# EAGLE board aurdino 12 (EAGLE 9.7.0)

Size 84.16 x 104.87 mm. Coordinates in mm from the lower left corner, seen from the top.
Outline: 0,0 84.17,0 84.17,104.87 0,104.87 0,0
Copper layers (1*16): Top 0.035mm / dielectric 1.5mm / Bottom 0.035mm
Design rules "default": minimum track width 6mil, minimum drill 0.35mm, track to track 6mil, track to pad 6mil, pad to pad 6mil, via to via 6mil, smd to smd 6mil, copper to edge 40mil, drill to drill 6mil, minimum pad ring 10mil, minimum via ring 8mil, stop-mask expansion 4mil, vias tented up to drill 0mil, thermal gap 10mil

## Footprints (pad centres in the part's own frame; a part is rotated, then mirrored left to right if it is on the bottom)
LEDRD254W60D565H860B = drill 0.981 pad 1.581: 1 -1.27,0; 2 1.27,0
LEDRD254W60D565H860B_O = drill 0.981 pad 1.581: 1 -1.27,0; 2 1.27,0
LEDRD254W60D565H860B_Y = drill 0.981 pad 1.581: 1 -1.27,0; 2 1.27,0
LEDRD254W60D565H860B_G = drill 0.981 pad 1.581: 1 -1.27,0; 2 1.27,0
LEDRD254W60D565H860B_B = drill 0.981 pad 1.581: 1 -1.27,0; 2 1.27,0
LEDRD254W60D565H860B_W = drill 0.981 pad 1.581: 1 -1.27,0; 2 1.27,0
RESAD1016W63L850D250B = drill 0.83 pad 1.43: 1 -5.08,0; 2 5.08,0
SWITCH-MOMENTARY-PTH-6.5MM = drill 1.016 pad 1.88: 1 -3.251,2.261; 2 3.251,2.261; 3 -3.251,-2.261; 4 3.251,-2.261
ARDUINO-UNO-R3-SHIELD = drill 1.016 pad 1.88: 3.3V 24.13,-2.54; 5V 24.13,0; A0 24.13,12.7; A1 24.13,15.24; A2 24.13,17.78; A3 24.13,20.32; A4 24.13,22.86; A5 24.13,25.4; AREF -24.13,-13.97; D2 -24.13,20.32; D3 -24.13,17.78; D4 -24.13,15.24; D5 -24.13,12.7; D6 -24.13,10.16; D7 -24.13,7.62; D8 -24.13,3.81; D9 -24.13,1.27; D10 -24.13,-1.27; D11 -24.13,-3.81; D12 -24.13,-6.35; D13 -24.13,-8.89; GND@0 24.13,2.54; GND@1 24.13,5.08; GND@2 -24.13,-11.43; IOREF 24.13,-7.62; NC 24.13,-10.16; RES 24.13,-5.08; RX -24.13,25.4; SCL -24.13,-19.05; SDA -24.13,-16.51; TX -24.13,22.86; VIN 24.13,7.62

## Placement (x,y rotation side)
D1  RED  [LEDRD254W60D565H860B]  14.61,93.7 180 top
D2  ORANGE  [LEDRD254W60D565H860B_O]  27.3,93.7 180 top
D3  YELLOW  [LEDRD254W60D565H860B_Y]  40.01,93.7 180 top
D4  GREEN  [LEDRD254W60D565H860B_G]  52.7,93.7 180 top
D5  BLUE  [LEDRD254W60D565H860B_B]  65.41,93.7 180 top
D6  WHITE  [LEDRD254W60D565H860B_W]  78.11,93.7 180 top
R1  10k  [RESAD1016W63L850D250B]  23.5,81 90 top
R2  10k  [RESAD1016W63L850D250B]  10.79,81 90 top
R3  220k  [RESAD1016W63L850D250B]  13.34,81 90 top
R4  220k  [RESAD1016W63L850D250B]  26.04,81 90 top
R5  10k  [RESAD1016W63L850D250B]  36.2,81 90 top
R6  220k  [RESAD1016W63L850D250B]  38.73,81 90 top
R7  10k  [RESAD1016W63L850D250B]  48.9,81 90 top
R8  10k  [RESAD1016W63L850D250B]  61.59,81 90 top
R9  10k  [RESAD1016W63L850D250B]  74.3,81 90 top
R10  220k  [RESAD1016W63L850D250B]  51.44,81 90 top
R11  220k  [RESAD1016W63L850D250B]  64.14,81 90 top
R12  220k  [RESAD1016W63L850D250B]  76.83,81 90 top
S1  SWITCH_MOMENTARY  [SWITCH-MOMENTARY-PTH-6.5MM]  8.26,97.51 90 top
S2  SWITCH_MOMENTARY  [SWITCH-MOMENTARY-PTH-6.5MM]  20.95,97.51 90 top
S3  SWITCH_MOMENTARY  [SWITCH-MOMENTARY-PTH-6.5MM]  33.66,97.51 90 top
S4  SWITCH_MOMENTARY  [SWITCH-MOMENTARY-PTH-6.5MM]  46.35,97.51 90 top
S5  SWITCH_MOMENTARY  [SWITCH-MOMENTARY-PTH-6.5MM]  59.05,97.51 90 top
S6  SWITCH_MOMENTARY  [SWITCH-MOMENTARY-PTH-6.5MM]  71.75,97.51 90 top
U1  ARDUINO-UNO-R3-SHIELD  [ARDUINO-UNO-R3-SHIELD]  49.21,29.84 270 top

## Library data of the parts
D1 = Tinkercad; CATEGORY: Opto-Electronic; SUB-CATEGORY: LED; VALUE: LED_RED
D2 = Tinkercad; CATEGORY: Opto-Electronic; SUB-CATEGORY: LED; VALUE: LED_ORANGE
D3 = Tinkercad; CATEGORY: Opto-Electronic; SUB-CATEGORY: LED; VALUE: LED_YELLOW
D4 = Tinkercad; CATEGORY: Opto-Electronic; SUB-CATEGORY: LED; VALUE: LED_GREEN
D5 = Tinkercad; CATEGORY: Opto-Electronic; SUB-CATEGORY: LED; VALUE: LED_BLUE
D6 = Tinkercad; CATEGORY: Opto-Electronic; SUB-CATEGORY: LED; VALUE: LED_WHITE
R1-R12 S1-S6 U1 = Tinkercad

## Nets
D1_C: D1.2 R3.2
D2_C: D2.2 R4.2
D3_C: D3.2 R6.2
D4_C: D4.2 R10.2
D5_C: D5.2 R11.2
D6_C: D6.2 R12.2
U1_5V: S1.1 S1.2 S2.1 S2.2 S3.1 S3.2 S4.1 S4.2 S5.1 S5.2 S6.1 S6.2 U1.5V
U1_D2: R2.2 S1.3 S1.4 U1.D2
U1_D3: R1.2 S2.3 S2.4 U1.D3
U1_D4: R5.2 S3.3 S3.4 U1.D4
U1_D5: R7.2 S4.3 S4.4 U1.D5
U1_D6: R8.2 S5.3 S5.4 U1.D6
U1_D8: D6.1 U1.D8
U1_D9: D1.1 U1.D9
U1_D10: D2.1 U1.D10
U1_D11: D3.1 U1.D11
U1_D12: D4.1 U1.D12
U1_D13: D5.1 U1.D13
U1_GND: R1.1 R2.1 R3.1 R4.1 R5.1 R6.1 R7.1 R8.1 R9.1 R10.1 R11.1 R12.1 U1.GND@0 U1.GND@1 U1.GND@2
U1_TX: R9.2 S6.3 S6.4 U1.TX

## Tracks (layer width: path | path; a pad name or v marks a point on that pad's centre or on a via)
D1_C  (1 unrouted)
D2_C  (1 unrouted)
D3_C  (1 unrouted)
D4_C  (1 unrouted)
D5_C  (1 unrouted)
D6_C  (1 unrouted)
U1_5V  (12 unrouted)
U1_D2  (3 unrouted)
U1_D3  (3 unrouted)
U1_D4  (3 unrouted)
U1_D5  (3 unrouted)
U1_D6  (3 unrouted)
U1_D8  (1 unrouted)
U1_D9  (1 unrouted)
U1_D10  (1 unrouted)
U1_D11  (1 unrouted)
U1_D12  (1 unrouted)
U1_D13  (1 unrouted)
U1_GND  (14 unrouted)
U1_TX  (3 unrouted)